# Altium PCB PCB1.PcbDoc
Units mm, origin at the board's own origin, x right, y up, seen from the top; angles counter-clockwise.
Board outline 25 x 35.18 mm, 2 copper layers (Top Layer, Bottom Layer); 7 components, 8 nets, 45 pads, 0 vias.
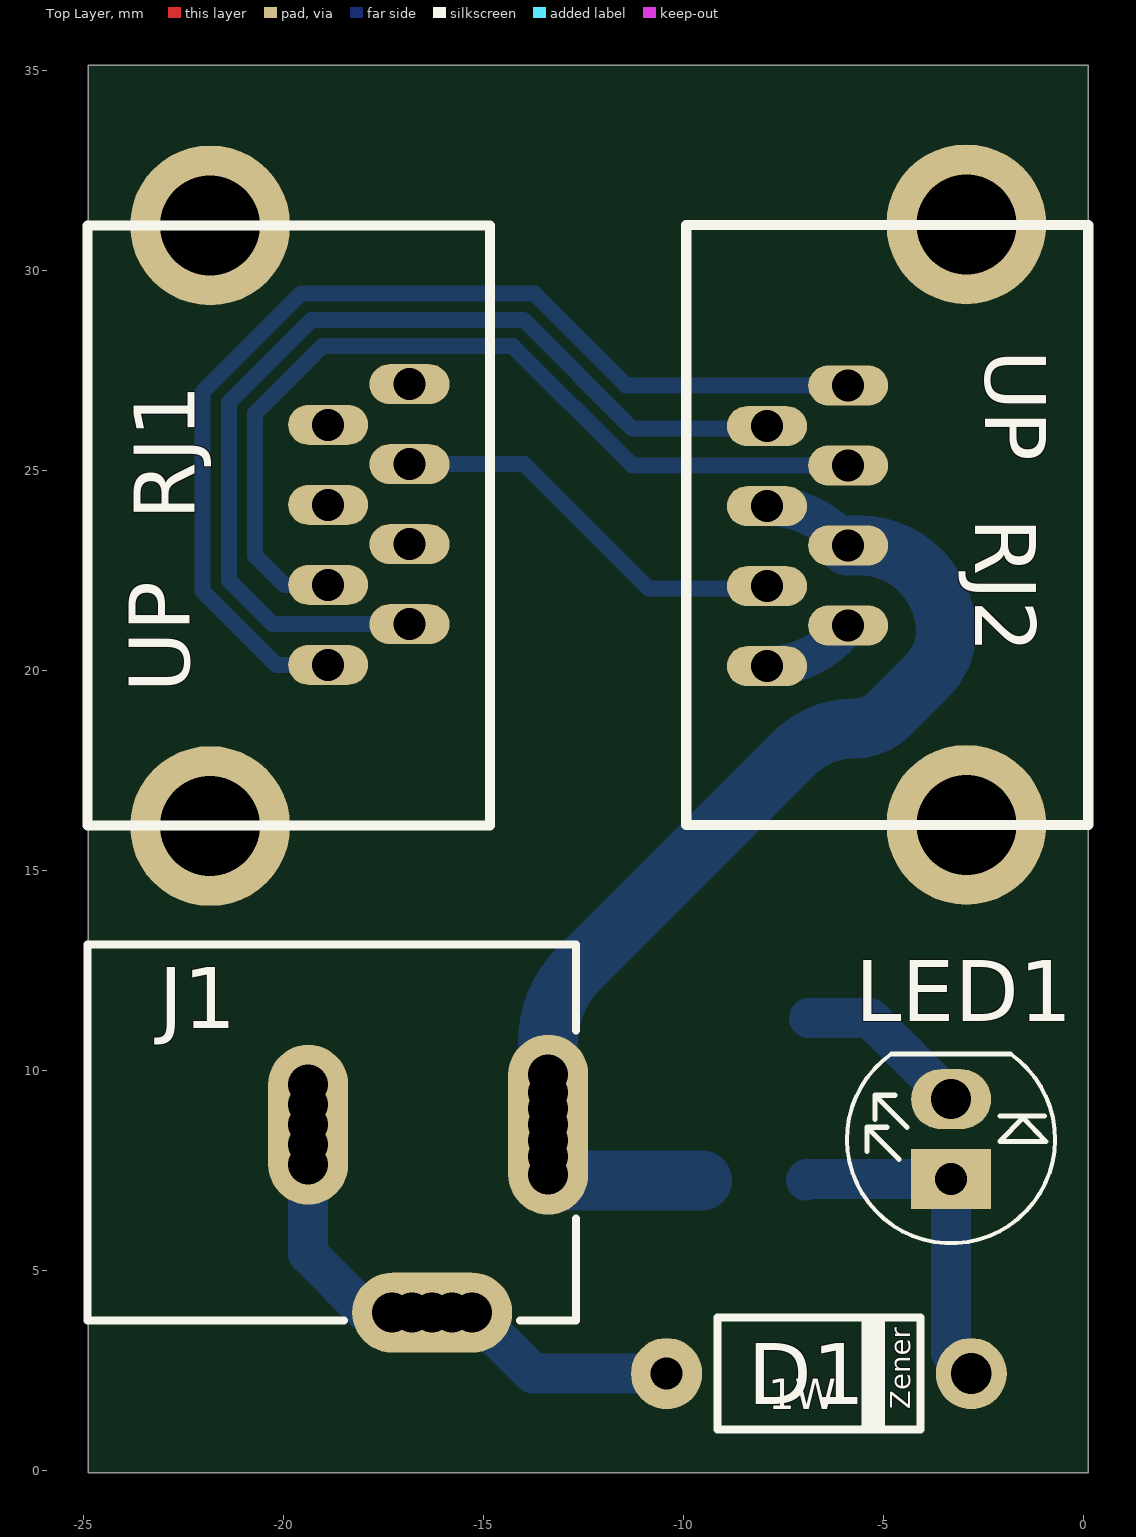
[diagram p0: Top Layer view]
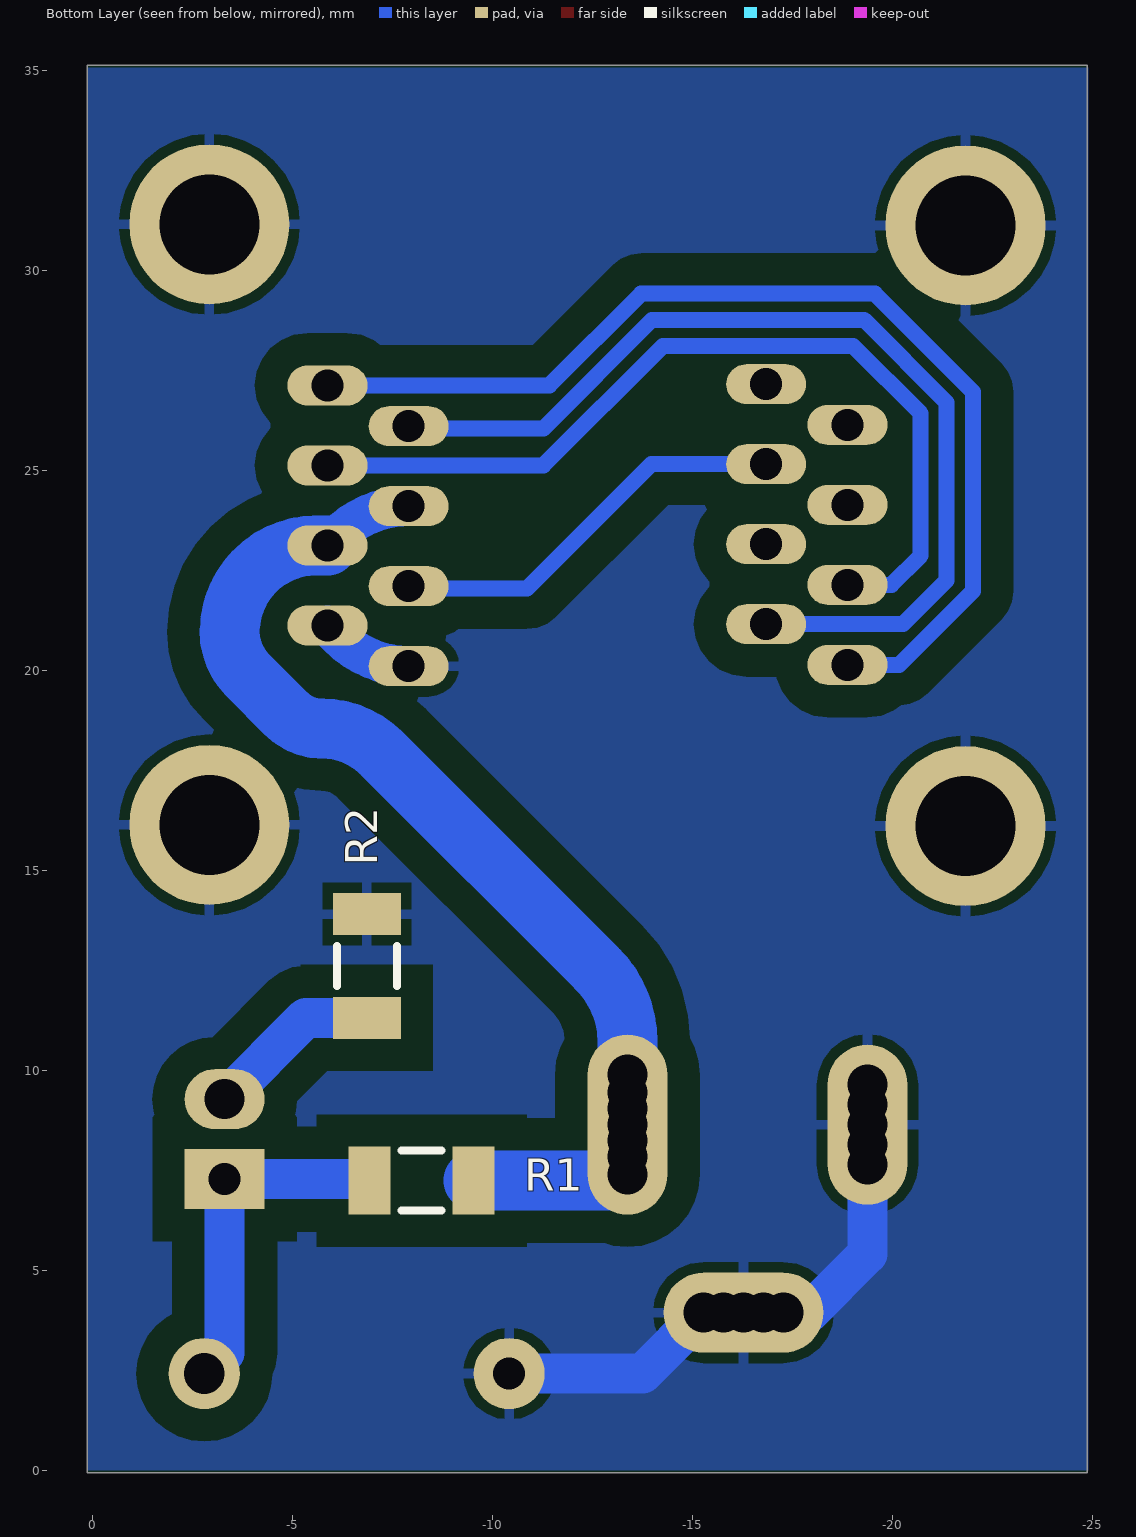
[diagram p1: Bottom Layer view, seen from below]

## Layer stack, top to bottom
Top Solder: solder mask 0.0102, Solder Resist, Dk 3.5
Top Layer: signal copper 0.0356
Dielectric 1: dielectric 0.32, FR-4, Dk 4.8
Bottom Layer: signal copper 0.0356
Bottom Solder: solder mask 0.0102, Solder Resist, Dk 3.5

## Board outline
-24.872,-0.063 -24.872,35.116 0.128,35.116 0.128,-0.063

## Design rules (kind name [scope] priority, off if disabled: settings)
Clearance [All] p1: gap=0.25 ignorepadtopadclearanceinfootprint=FALSE
PolygonConnect [All] p1: connectstyle=Relief reliefconductorwidth=0.254 reliefentries=4 polygonreliefangle="90 Angle" airgapwidth=0.254
RoutingVias [All] p1: holewidth=0.711 width=1.27 viastyle="Through Hole" minholewidth=0.711 minwidth=1.27 maxholewidth=0.711 maxwidth=1.27
SolderMaskExpansion [All] p1: expansion=0.102
Width [All] p1: maxlimit=3 minlimit=0.254 preferedwidth=1.5
30 further rules are at their usual default settings.

## Classes and differential pairs
component class Sheet1: D1 LED1 R1 R2 RJ1 RJ2

## Components (designator, comment, footprint, x,y, rotation, side; value= is the part's Value field where it differs from the comment)
D1 "Diode Zener" "Diode 1W" -6.604,2.413 r0 top
J1 "Power Jack" "Power Jack" -27.872,8.636 r0 top
LED1 "Red" LED-5mm -3.302,7.271 r90 top
R1 "330" "RES 1206 (3216X08L)" -6.929,7.239 r180 bottom
R2 "330" "RES 1206 (3216X08L)" -6.858,13.899 r270 bottom
RJ1 "Rj45" rj45-w57-1 -16.841,21.146 r90 top
RJ2 "Rj45" rj45-w57-1 -7.904,26.099 r270 top

## Footprints (in the part's own frame and the unit in brackets; to place one, negate y for a bottom-side part, rotate by r counter-clockwise, add the part's x,y. Pads: shape width x height; smd on the part's side, far side on the other; paste and mask are expansions set on the pad)
"Diode 1W" [mil]
  round 70 hole 31.5: 1(-150,0)
  round 70 hole 40: 2(150,0)
  silkscreen extent -100,-55 100,55, body extent -166,-52 165,52, height 131
LED-5mm [mm]
  rect 1.5x2 hole 0.8: 1(0,0)
  oval 1.5x2 hole 1: 2(2,0)
  silkscreen extent -1.6,-2.6 3.13,2.6
"Power Jack" [mm] "Power Adaptor Jack"
  round 1.5 hole 1: 1(14.5,-1.25) 1(14.5,-0.8) 1(14.5,-0.4) 1(14.5,0.4) 1(14.5,0.8) 1(14.5,1.25) 2(8.5,-1) 2(8.5,1) 2(8.5,-0.5) 2(8.5,0.5) 3(10.6,-4.7) 3(11.1,-4.7) 3(12.1,-4.7) 3(12.6,-4.7)
  oval 2x4.5 hole 1: 1(14.5,0)
  oval 2x4 hole 1: 2(8.5,0)
  oval 4x2 hole 1: 3(11.6,-4.7)
  silkscreen extent 2.98,-4.9 15.2,4.5, body extent 0,-4.9 15.2,4.5, height 11
"RES 1206 (3216X08L)" [mm] "Chip Resistor, 2-Leads, Body 3.2x1.6mm, IPC High Density _ (0.125 W)"
  rect 1.05x1.7 smd: 1(0,0) 2(2.596,0)
  silkscreen extent 0.8,-0.75 1.8,0.75, body extent -0.23,-0.76 2.82,0.76, height 0.6
rj45-w57-1 [mm]
  oval 1x2 hole 0.8: 1(-1.016,2.032) 2(0,0) 3(0.984,2.032) 4(2,0) 5(2.984,2.032) 6(4,0) 7(4.984,2.032) 8(6,0)
  round 4 hole 2.5: 9(-5.046,4.983) 10(9.97,4.983)
  silkscreen extent -5.03,-2.02 9.97,8.05

## Part data
D1: "Zener Diode", Voltage="3.3 V", Company=E.P.I.L, Design Date=2011/11/02, Designer="Saeid Jorablo"
LED1: library part LED, "LED", Adding Date=1387/12/22, Color=Red, Designer="Saeid Jorablo", Organazation=ControTec, Size="SMD 1206"
R1 R2: library part Resistor, "Resistor", Power="1/8 W", Tolerance=5%
J1: Adding Date=10/21/2009, Company=Personal, Designer="Saeid Jorablo", Project Name=Laser

## Nets (pads, with @x,y where several pads share a name; then routed paths per layer and width w, separated by ;. In a path a pad name is that pad's centre, name@x,y a point inside that pad or via, vN(x,y) a via of type N, cw(c..) or ccw(c..) an arc to the next point about the centre after c; other vN are vias at no path point)
GND1: D1.1 J1.2 J1.3 R2.1 RJ1.9 RJ1.10 RJ2.7 RJ2.8 RJ2.9 RJ2.10 | length 15.8
  Bottom Layer w1: J1.2@-19.372,8.636 -19.372,7.636 -19.372,5.402 -17.906,3.936 -17.272,3.936 -16.772,3.936 -16.272,3.936 -15.772,3.936 -15.272,3.936 -13.749,2.413 D1.1 ; RJ2.8 ccw(c-7.904,22.552) -6.17,20.817 RJ2.7
NetD1_2: D1.2 LED1.1 R1.1 | length 8.7
  Bottom Layer w1: R1.1 -6.897,7.271 LED1.1 -3.302,2.921 D1.2
NetLED1_2: LED1.2 R2.2 | length 4.4
  Bottom Layer w1: R2.2 -5.334,11.303 LED1.2
NetRJ1_1: RJ1.1 RJ2.1 | length 27
  Bottom Layer w0.4: RJ1.1 -20.166,20.13 -22.009,21.973 -22.009,26.958 -19.559,29.408 -13.715,29.408 -11.422,27.115 RJ2.1 ; RJ2.1@-5.872,27.052 RJ2.1@-5.822,27.052
NetRJ1_2: RJ1.2 RJ2.2 | length 24.9
  Bottom Layer w0.4: RJ1.2 -20.257,21.146 -21.355,22.244 -21.355,26.687 -19.288,28.754 -13.986,28.754 -11.268,26.036 RJ2.2@-7.854,26.036
NetRJ1_3: RJ1.3 RJ2.3 | length 22.5
  Bottom Layer w0.4: RJ1.3 -19.971,22.13 -20.701,22.86 -20.701,26.416 -19.017,28.1 -14.257,28.1 -11.272,25.115 RJ2.3 ; RJ2.3@-5.872,25.052 RJ2.3@-5.822,25.052
NetRJ1_6: RJ1.6 RJ2.6 | length 10.3
  Bottom Layer w0.4: RJ1.6 -13.97,25.146 -10.86,22.036 RJ2.6@-7.854,22.036
VCC1: J1.1 R1.2 RJ2.4 RJ2.5 | length 30.1
  Bottom Layer w0.4: RJ2.4@-7.854,24.036 -7.343,24.036 -6.806,24.036 -6.274,23.504 RJ2.5@-5.822,23.052
  Bottom Layer w1: RJ2.4 cw(c-7.904,21.569) -7.343,24.036 cw(c-7.904,21.569) -6.274,23.504 cw(c-7.904,21.569) -6.115,23.358 RJ2.5
  Bottom Layer w1.5: J1.1@-13.372,7.386 ccw(c-13.017,7.741) -13.017,7.239 R1.2 ; J1.1@-13.372,7.836 -13.372,8.236 -13.372,8.636 -13.372,9.036 -13.372,9.436 -13.372,9.886 -13.372,10.722 cw(c-10.832,10.722) -12.628,12.518 -7.233,17.913 cw(c-5.715,16.396) -5.715,18.542 ccw(c-5.715,19.768) -4.848,18.901 -3.878,19.871 ccw(c-4.962,20.955) -3.429,20.955 ccw(c-5.589,20.955) -5.589,23.115 RJ2.5
pads on no net: RJ1.4 RJ1.5 RJ1.7 RJ1.8

## Polygon pours and split planes (outlines as drawn)
GND1 on Bottom Layer "Top Layer-No Net" (solid, remove dead copper, pour order 0): -24.892,35.052 0.127,35.052 0.127,0 -24.892,0

## Silkscreen, mask and mechanical layers (free items; w line width, h text height)
Mechanical 1:
  the board outline again, w0.254

## Text inside footprints (layer, text, board x,y; h text height)
D1: Top Overlay "1W" at -7.874,1.524 h0.76; Top Overlay "Zener" at -4.318,1.524 h0.5 r90
RJ1: Top Overlay "UP" at -22.332,19.432 h1.52 r90
RJ2: Top Overlay "UP" at -2.443,28.004 h1.52 r270